# Altium PCB Main.PcbDoc
Units mil, origin at the board's own origin, x right, y up, seen from the top; angles counter-clockwise.
Board outline 1880 x 1290 mil, 2 copper layers (Top Layer, Bottom Layer); 14 components, 10 nets, 42 pads, 2 vias.
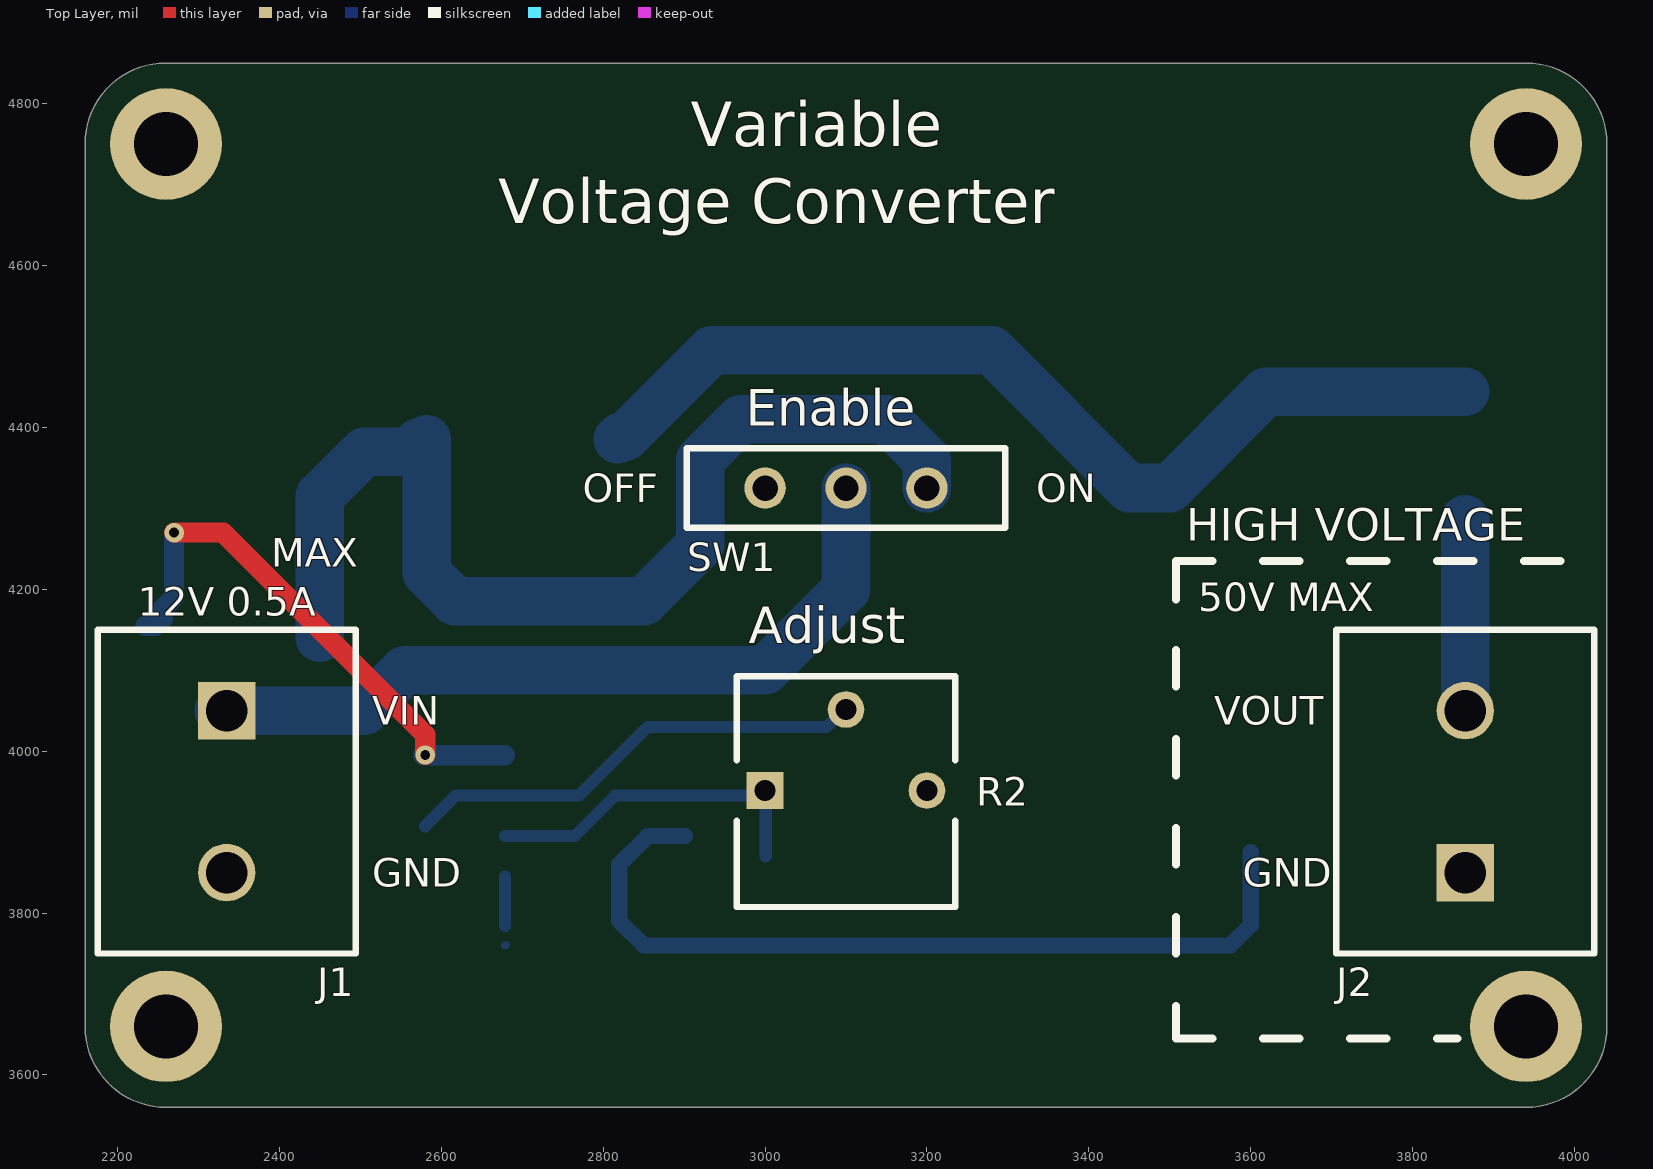
[diagram p0: Top Layer view]
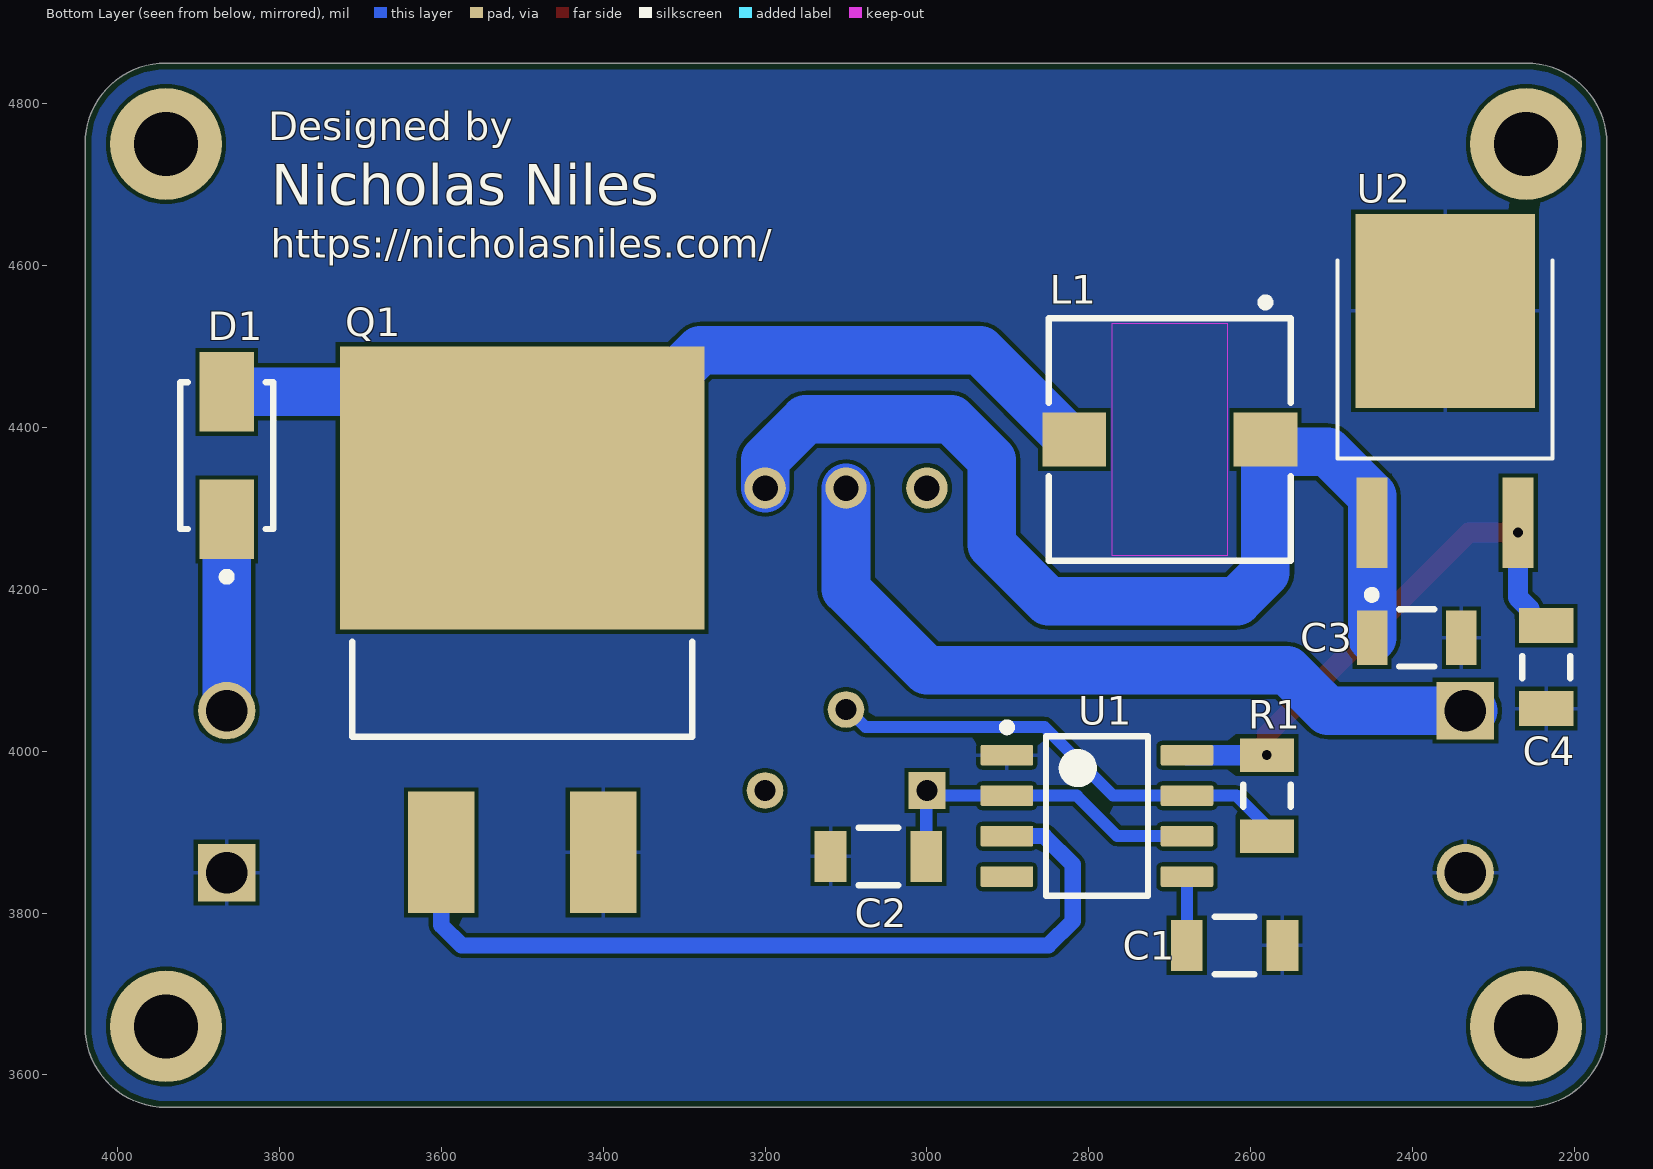
[diagram p1: Bottom Layer view, seen from below]
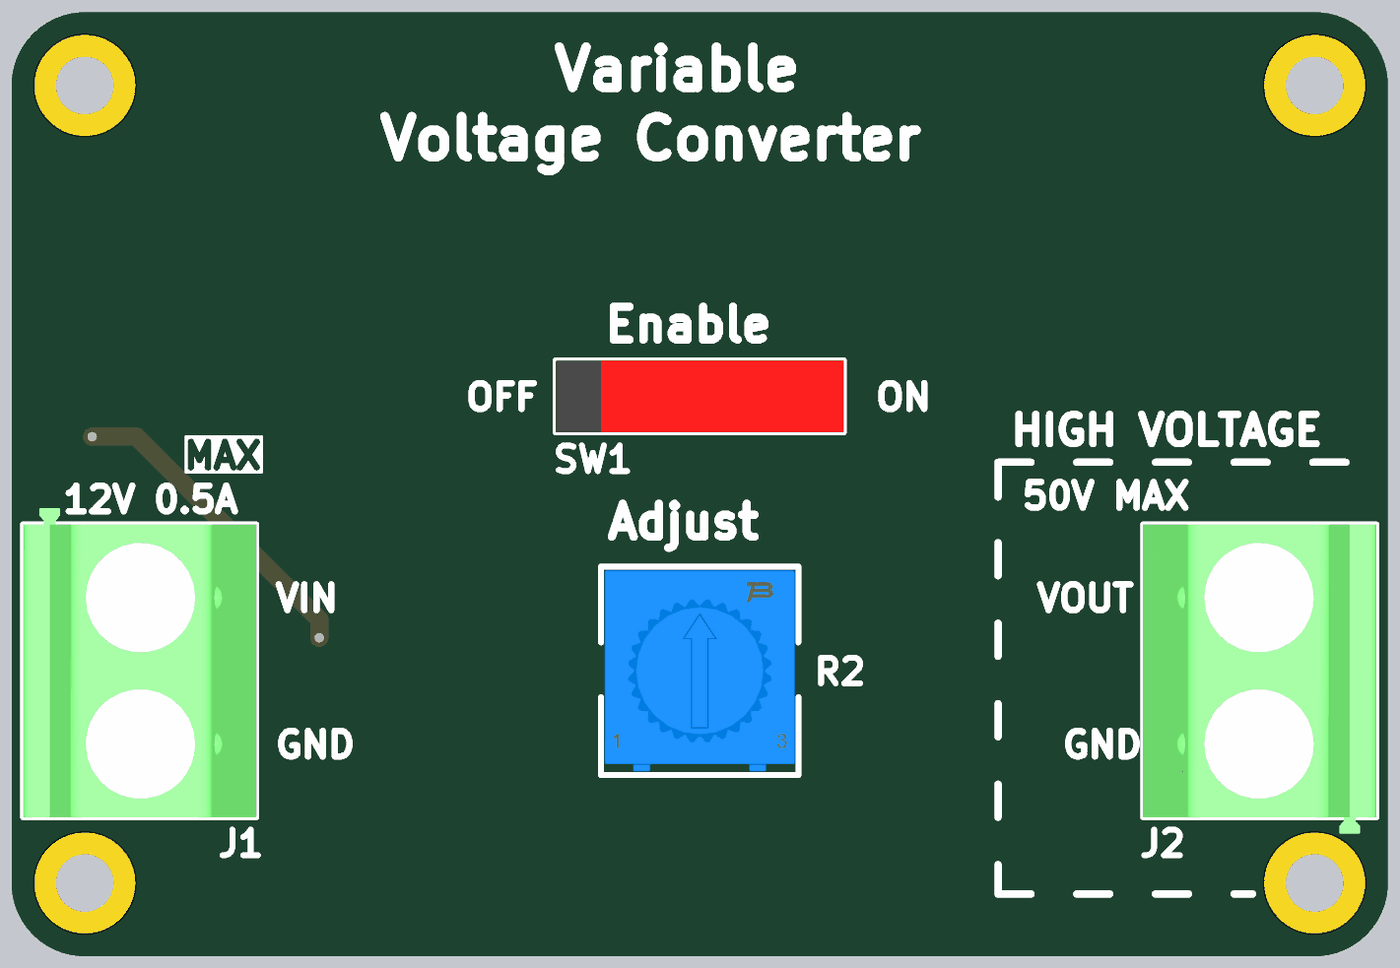
[diagram p2: 3D render of the assembled board from above, using the file's embedded part models]
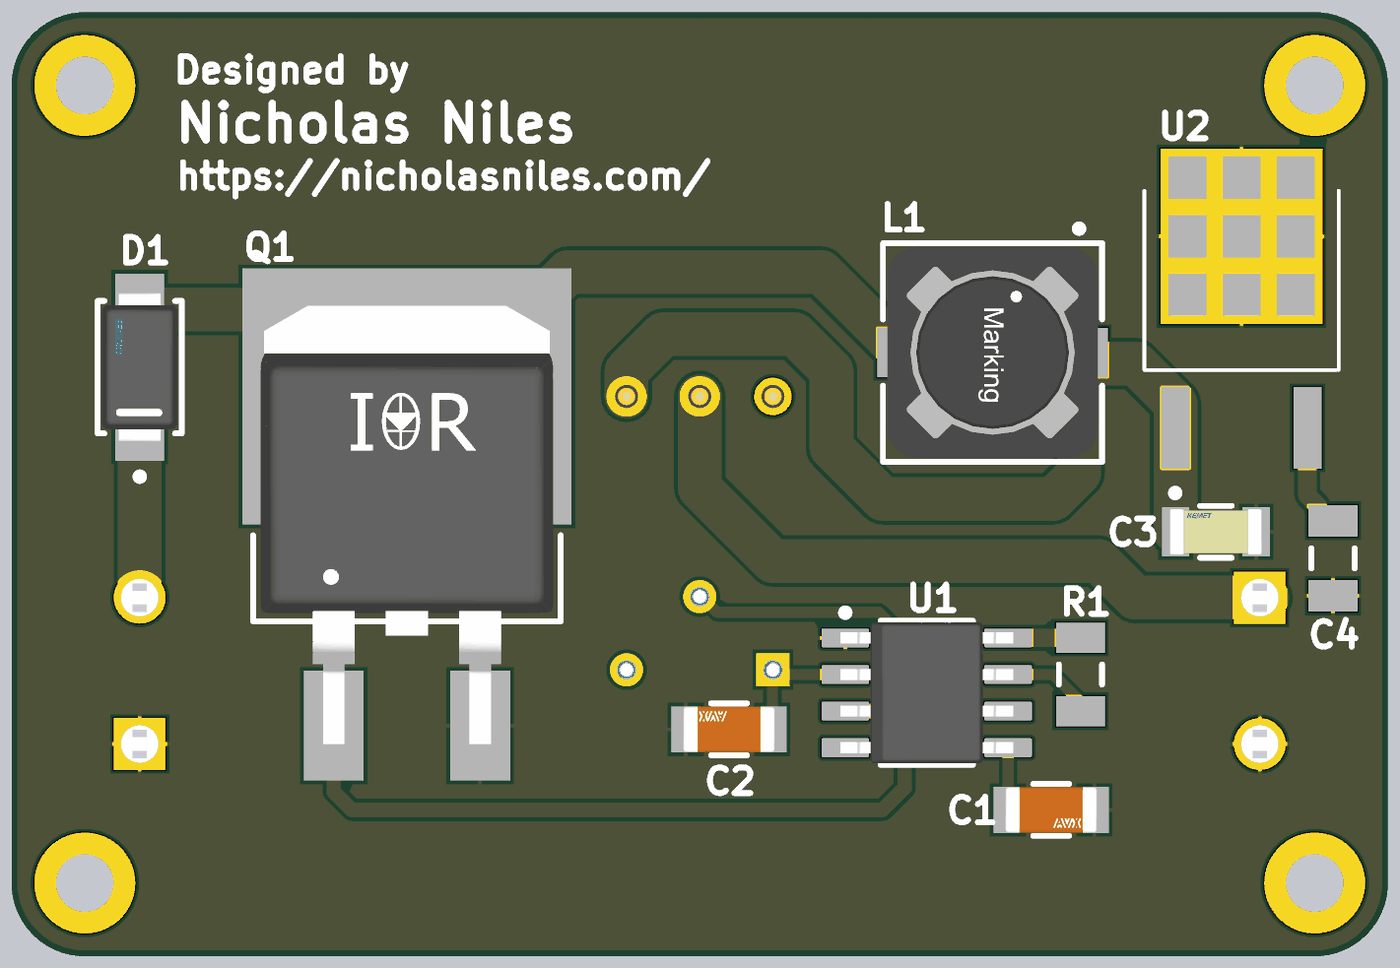
[diagram p3: 3D render of the assembled board from below, using the file's embedded part models]

## Layer stack, top to bottom
Top Solder: solder mask 0.4, Solder Resist, Dk 3.5
Top Layer: signal copper 1.4
Dielectric 1: dielectric 12.6, FR-4, Dk 4.8
Bottom Layer: signal copper 1.4
Bottom Solder: solder mask 0.4, Solder Resist, Dk 3.5

## Board outline
2160,3660 2160,4750 cw(c2260,4750) 2260,4850 3940,4850 cw(c3940,4750) 4040,4750 4040,3660 cw(c3940,3660) 3940,3560 2260,3560 cw(c2260,3660)

## Design rules (kind name [scope] priority, off if disabled: settings)
BoardOutlineClearance [All] p1: gap=7.87 ignorepadtopadclearanceinfootprint=FALSE
Clearance [All] p1: gap=5 ignorepadtopadclearanceinfootprint=TRUE except(10: Arc-Hole Track-Hole SMDPad-Hole THPad-Hole Via-Hole Fill-Hole Poly-Hole Region-Hole Text-Hole)
ComponentClearance [All] p1: gap=5 collisioncheckmode=3 verticalgap=5 showdistances=TRUE
DiffPairsRouting [All] p1: maxlimit=10 minlimit=5 mostfreqgap=5 toplayer_minwidth=5 toplayer_maxwidth=1000 toplayer_prefwidth=5 bottomlayer_minwidth=5 bottomlayer_maxwidth=1000 bottomlayer_prefwidth=5 maxuncoupledlength=500
Height [All] p1: minheight=0 maxheight=71497.94 prefheight=500
HoleSize [All] p1: absolutevalues=TRUE maxlimit=248.03 minlimit=11.81 maxpercent=80.000 minpercent=20.000
HoleToHoleClearance [All] p1: gap=10 allowstackedmicrovias=FALSE
MinimumAnnularRing [All] p1: minimumring=6
MinimumSolderMaskSliver [All] p1: minsoldermaskwidth=6
PlaneClearance [All] p1: clearance=5
PlaneConnect PlaneConnectPowerPads [InPadClass('PowerPads')] p1: planeconnectstyle=Direct reliefexpansion=20 reliefentries=4 reliefconductorwidth=10 reliefairgap=10
PlaneConnect [All] p2: pad.planeconnectstyle=Relief pad.reliefexpansion=11.81 pad.reliefentries=4 pad.reliefconductorwidth=5 pad.reliefairgap=5 via.planeconnectstyle=Direct via.reliefexpansion=11.81 via.reliefentries=4 via.reliefconductorwidth=5 via.reliefairgap=5
PolygonConnect PolygonConnectPowerPads [All vs (InPadClass('PowerPads'))] p1: connectstyle=Direct reliefconductorwidth=10 reliefentries=4 polygonreliefangle="90 Angle" airgapwidth=10
PolygonConnect [All] p2: thpad.connectstyle=Relief thpad.reliefconductorwidth=5 thpad.reliefentries=4 thpad.polygonreliefangle="90 Angle" thpad.airgapwidth=5 smdpad.connectstyle=Relief smdpad.reliefconductorwidth=5 smdpad.reliefentries=4 smdpad.polygonreliefangle="90 Angle" smdpad.airgapwidth=5 via.connectstyle=Direct via.reliefconductorwidth=5 via.reliefentries=4 via.polygonreliefangle="90 Angle" via.airgapwidth=5
RoutingVias [All] p1: holewidth=11.81 width=23.62 viastyle="Through Hole" minholewidth=11.81 minwidth=23.62 maxholewidth=23.62 maxwidth=259.84
SilkToSilkClearance [All] p1: silktosilkclearance=5
SilkToSolderMaskClearance [IsPad] p1: minsilkscreentomaskgap=5 clearancetoexposedcopper=TRUE
SolderMaskExpansion [All] p1: expansion=2 istentingtop=FALSE
SupplyNets "Schematic Supply Nets_2" [InNet('5V')] p1: voltage=0.000
SupplyNets "Schematic Supply Nets_1" [InNet('VIN')] p2: voltage=0.000
SupplyNets "Schematic Supply Nets" [InNet('GND')] p3: voltage=0.000
UnRoutedNet [All] p1: checkbadconnections=TRUE
Width Width_10mil [All] p1: maxlimit=1000 minlimit=10 preferedwidth=10 minimp=50.000000 maximp=50.000000 favimp=50.000000
Width Width_6mil [All] p2: maxlimit=1000 minlimit=6 preferedwidth=6 minimp=50.000000 maximp=50.000000 favimp=50.000000
Width Power_20mil [All] p3: maxlimit=1000 minlimit=20 preferedwidth=20 minimp=50.000000 maximp=50.000000 favimp=50.000000
Width Power_12mil [All] p4: maxlimit=1000 minlimit=12 preferedwidth=12 minimp=50.000000 maximp=50.000000 favimp=50.000000
Width Width_5mil [All] p5: maxlimit=1000 minlimit=5 preferedwidth=5 minimp=50.000000 maximp=50.000000 favimp=50.000000
19 further rules are at their usual default settings.

## Components (designator, comment, footprint, x,y, rotation, side; value= is the part's Value field where it differs from the comment)
C1 "100nF" FP-1206-L_3_2_0_2-W_1_6_0-MFG 2620,3760 r180 bottom
C2 "100nF" FP-1206-L_3_2_0_2-W_1_6_0-MFG 3060,3870 r0 bottom
C3 "0.33µF" FP-C1206C-EB-MFG 2395,4140 r180 bottom value="0.33 μF"
C4 "1µF" CAPC3216X110X50LL20T25 2235,4103.82 r270 bottom
D1 "S1B-13-F" FP-SMA-MFG 3865,4365 r90 bottom
J1 "1729128" PHOE-1729128-2_V 2335,3950 r270 top
J2 "1729128" PHOE-1729128-2_V 3865,3950 r90 top
L1 "4.7uH" WE-PDA_7345 2700,4385 r270 bottom
Q1 "IRLZ44NSTRLPBF" FP-PG-TO263-3-MFG 3500,4150 r180 bottom
R1 "1kΩ" RESC3116X65X50LL20T20 2580,3945 r90 bottom
R2 "100kΩ" FP-3362P-T-MFG 3100,3950 r0 top
SW1 "450301014042" 450301014042 3100,4325 r180 top
U1 "555 Timer IC" D0008A_M 2790,3920 r180 bottom
U2 "VIN->5V0" DPAK229P990X238-4N 2360,4445 r180 bottom

## Footprints (in the part's own frame and the unit in brackets; to place one, negate y for a bottom-side part, rotate by r counter-clockwise, add the part's x,y. Pads: shape width x height; smd on the part's side, far side on the other; paste and mask are expansions set on the pad)
450301014042 [mm] "THT Mini Slide Switch, body 10x2.5mm"
  round 1.3 hole 0.8: COM(0,0) L1(2.54,0) L2(-2.54,0)
  silkscreen extent -5,-1.25 5,1.25, body extent -5,-1.25 5,1.25, height 6.43
CAPC3216X110X50LL20T25 [mm] "Chip Capacitor, 2-Leads, Body 3.20x1.60mm, IPC High Density"
  rect 1.1x1.7 smd: 1(-1.3,0) 2(1.3,0)
  silkscreen extent -0.35,-0.75 0.35,0.75, body extent -1.7,-0.9 1.7,0.9, height 1.1
D0008A_M [mm] "SOIC, 8-Leads, Body 5x4mm, Pitch 1.27mm, IPC Low Density"
  rrect15% 1.65x0.65 smd: 1(-2.825,1.905) 2(-2.825,0.635) 3(-2.825,-0.635) 4(-2.825,-1.905) 5(2.825,-1.905) 6(2.825,-0.635) 7(2.825,0.635) 8(2.825,1.905)
  silkscreen extent -2.95,-2.5 1.6,2.9, body extent -3,-2.45 3,2.45, height 1.63
DPAK229P990X238-4N [mm]
  rect 0.97x2.83 smd: 1(-2.29,-4.14) 3(2.29,-4.14)
  rect 5.63x6.09 smd paste-4: 2(0,2.51)
  silkscreen extent -3.37,-6.5 3.37,4.09
FP-1206-L_3_2_0_2-W_1_6_0-MFG [mm]
  rect 1x1.6 smd paste+0 mask+0: 1(-1.5,0) 2(1.5,0)
  silkscreen extent -0.63,-0.9 0.63,0.9, body extent -1.6,-0.8 1.6,0.8, height 1.27
FP-3362P-T-MFG [mm]
  rect 1.15x1.15 hole 0.65 paste-2539.97 mask+0: 1(-2.54,0.035)
  round 1.15 hole 0.65 paste-2539.97 mask+0: 2(0,2.575) 3(2.54,0.035)
  silkscreen extent -3.42,-3.62 3.42,3.62, body extent -3.52,-3.72 3.52,3.72, height 0.25
FP-C1206C-EB-MFG [mm]
  rect 0.95x1.7 smd paste+0 mask+0: 1(-1.4,0) 2(1.4,0)
  silkscreen extent -0.55,-0.9 0.55,0.9, body extent -1.6,-0.8 1.6,0.8, height 0.88
FP-PG-TO263-3-MFG [mm]
  rect 2.08x3.81 smd paste+0 mask+0: 1(-2.54,-6.985) 3(2.54,-6.985)
  rect 11.43x8.89 smd paste+0 mask+0: 4(0,4.445)
  silkscreen extent -5.34,-3.36 5.34,-0.38, body extent -5.08,-7.66 5.08,7.59, height 5.09
FP-SMA-MFG [mm]
  rect 2.5x1.7 smd paste+0 mask+0: 1(-2,0) 2(2,0)
  silkscreen extent -3.92,-1.46 2.3,1.46, body extent -2.6,-1.3 2.6,1.3, height 2.4
PHOE-1729128-2_V [mm] "Receptacle, 2-Leads, Body 8.1x10.16mm, Pitch 5.08mm"
  rect 1.8x1.8 hole 1.3: 1(-2.54,0)
  round 1.8 hole 1.3: 2(2.54,0)
  silkscreen extent -5.08,-4.05 5.08,4.05, body extent -5.65,-4.05 5.08,4.05, height 10.01
RESC3116X65X50LL20T20 [mm] "Chip Resistor, 2-Leads, Body 3.10x1.60mm, IPC High Density"
  rect 1.05x1.7 smd: 1(-1.275,0) 2(1.275,0)
  silkscreen extent -0.35,-0.75 0.35,0.75, body extent -1.65,-0.9 1.65,0.9, height 0.65
WE-PDA_7345 [mm] "SMD Shielded Power Inductor, 2-leads, body 7.3x7.3mm"
  rect 1.7x2 smd: 1(0,3) 2(0,-3)
  Top Layer keep-out region: -3.65,1.8 3.65,1.8 3.65,-1.8 -3.65,-1.8
  silkscreen extent -4.42,-3.8 3.8,3.8, body extent -3.65,-3.65 3.65,3.65, height 4

## Part data
C1 C2: library part CMP-04427-004798-1, "General Purpose Ceramic Capacitor, 1206, 100nF, 10%, X7R, 15%, 100V", Case Code (Imperial)=1206, Case Code (Metric)=3216, Dielectric=X7R, Max Operating Temperature=125°C, Min Operating Temperature=-55°C, Package Quantity=1, Tolerance=10%, Voltage Rating=100V, Capacitance=100nF, Case/Package=1206, Construction=Flat, Depth=1.6mm, Features="Soft Termination", Lead Free="Lead Free", Length=3.2mm, Mount="Surface Mount", Number of Pins=2, Packaging="Tape and Reel", Radiation Hardening=No, REACH SVHC="No SVHC", RoHS Compliant=Yes, Series=FLEXITERM®, Termination=SMD/SMT, Thickness=0.05inch, Voltage Rating (DC)=100V, Width=0.063inch
C3: library part CMP-1037-04487-2, "CAP CER 0.33UF 50V X7R 1206", Capacitance="0.33 μF", Manufacturer=KEMET, Manufacturer Part Number=C1206C334K5RACTU, Package=C1206C-EB, Temperature="-55°C to +150°C", Temperature Characteristic=X7R, Temperature Coefficient=15%, Temperature Range High=+150°C, Temperature Range Low=-55°C, Tolerance=0.1, Voltage Rating="50 V", Automotive=Yes, Automotive Grade="Grade 0", Category=Cap, ComponentLink2Description=Datasheet, ComponentLink2URL=https://content.kemet.com/datasheets/KEM_C1007_X8R_ULTRA_150C_SMD.pdf, Device Class L1="Passive Components", Device Class L2=Capacitors, Device Class L3="Ceramic Capacitors", Digikey Description="CAP CER 0.33UF 50V X7R 1206", Height=0.88mm, Ipc Land Pattern Name=CAPC320160X78, Lead Free=Yes, Material=Ceramic, Mouser Description="Multilayer Ceramic Capacitors MLCC - SMD/SMT 50volts 0.33uF X7R 10%", Octopart=https://octopart.com/c1206c334k5ractu-kemet-146059, RoHS=TRUE
C4: library part CMP-2000-06011-1, "Chip Capacitor, 1 uF, +/- 10%, 50 V, -55 to 125 degC, 1206 (3216 Metric), RoHS, Tape and Reel", Capacitance=1uF, Capacitance - nF=1000nF, Case Code - in=1206, Case Code - mm=3216, Case Height=1mm, Case Length=3.2mm, Case Width=1.6mm, Dielectric=X7R, Manufacturer=Kemet, Maximum Operating Temperature=+125C, Minimum Operating Temperature=-55C, Operating Temperature Range=-55Cto+125C, Package / Case=1206(3216metric), Package Description="2-Pin Surface Mount Device, Body 3.2 x 1.6 mm", Temperature Coefficient / Code=+/-15%, Tolerance=10%, Voltage Rating=50V, Brand=Kemet, Class=Class1, Datasheet URL=http://www.kemet.com/docfinder?Partnumber=C1206C105K5RACTU, Datasheet Version=02/2016, Dimensions=1.6mmWx3.2mmLx1mmH, Factory Pack Quantity=2500, Manufacturer URL=http://www.kemet.com/, Mounting Technology=SurfaceMount, Package Reference=1206, Packaging=Reel, Product=GeneralTypeMLCCs, Product Category=MultilayerCeramicCapacitorsMLCC-SMD/SMT, RoHS=Details, Series=C1206C, Termination Style=SMD/SMT, Type=SMDMLCCX7R6.3-250VDCCommericalGrade, Voltage Rating DC=50V
D1: library part CMP-12791-000051-1, "DIODE GEN PURP 100V 1A SMA", Average Rectified Current=1A, Capacitance=10pF, Case/Package=SMA, Forward Voltage=1.1V, Max Operating Temperature=150°C, Max Repetitive Reverse Voltage (Vrrm)=100V, Max Surge Current=30A, Min Operating Temperature=-65°C, Package Quantity=5000, Peak Reverse Current=5uA, Contact Plating=Tin, Current Rating=1A, Element Configuration=Single, Forward Current=1A, Height=2.1mm, Lead Free="Lead Free", Length=4.6mm, Max Reverse Voltage (DC)=100V, Mount="Surface Mount", Number of Pins=2, Output Current=1A, Packaging="Tape and Reel", Peak Non-Repetitive Surge Current=30A, Polarity=Standard, Radiation Hardening=No, Recovery Time=1.8us, Reverse Recovery Time=3us, Reverse Voltage (DC)=100V, Termination=SMD/SMT, Voltage Rating (DC)=100V, Weight=0.002258oz, Width=2.92mm
J1 J2: library part CMP-2000-05815-1, "PCB Terminal Block, 13.5 A, 400 V, 2-Pin THD, RoHS, Bulk", Current Rating=13500mA, Manufacturer="Phoenix Contact", Package Description="2-Pin Through Hole Device, Body 8.1 x 10.16 mm, Pitch 5.08 mm", Package Reference=1729128-2, Package Version=03/2015, Voltage Rating=400V, Datasheet URL=https://datasheet.ciiva.com/16046/1729128-16046181.pdf, Datasheet Version=12/2013, Manufacturer URL=http://www.phoenixcontact.com/, Mounting Technology=ThroughHole, No. of Positions=2, No. of Rows=1, Orientation=Horizontal, Package URL=https://www.phoenixcontact.com/online/portal/pi/pxc/product_detail_page/!ut/p/b1/3VdJjqNKFDxLH8AFycySyWY2ozFsEPOMMQaDOX1XedGL_1Vdm5YXJleknhSKeBkvI6EA8ncAo3AYoDhBQGco6KN7VURTdemj9us_IEKEZo_YHiPAEWEFmDGOHMORkqKYCORBZxgL7ZoaZYcbFFUZ3fqxSY6GOuxydWUuHqz1ynmMFygu583Bob0Ewr6Sd_l-5m-kAueHiB0jpRwZwe58wwtkpxtMYd_LmGcDRU02dRNEyWt6Y2ti5pSyJ_reIkzIulrqApdnbT11V5jnCKbYNCvhEM1MCpPByat_X379-iThf08CI5GfOPqfBeS3BRoBOdD55AKVv0iLwCMq-2BrzXWSGRH7pUGD9uwXQjiph3xL0DKQwdGa0JImiIOmBNOestqgwTHSSs2oOep-78apyXQBvNi8ZLaFjvjWvcaUEBu0MC6Wbe-d6mB0FAebo2lUWinqYaZs5DAYzV0RP9yitUjnGJ0iI9xhZkT42OCQNUJJhkgWINNQLP2JFP6OpMg3JCVg70jqHT0lvKOnhHf0lPuOnnLf0VPuWx6_dxwUIvwk5WMkT0kLL1mh61l2yZVSzG3pYV_bqo-mj6uMKwKwdnnW8Jh5RTOJzMOA5c-eJDaZQw4mTMPH02PvS_ZAqNVjVTo2WyYLkwH_KU1mmmG5kjRhDqPXLwwVHvVOjCM60-fpXvTDfMGW1PVFVS1r4e4yVDk4ZdNbkUHvqPqQSeian4UD39fNKmachqdJ1NJbyk8rXT9mXTvPk3oE5meulKGgiruPJek-4I9hTT6G8ZLOyRSm2RRVbThERQad5OS28hdt4YW4vG0stgYYzsWsK4_7y6DZMjJSCqri1kyiZR5vD7pwIrNR7QwPHTcLTI5qT7eRlpHrdGiupYlqQDJ7zy_CND8fWWBoLRXxk1RVcXiBQwbTD4Xi7KL-FuO94t9xaqweXzH, Packing=Bulk, PartNumber=1729128, Pitch=5.08mm, RoHS=TRUE
L1: library part 784777047, "WE-PDA SMT Shielded Power Inductor, size 7345, 4.7uH, 2.35A, 84mOhm", Case/Size Code=7345, DC Resistance=70mOhm, DC Resistance Max=84mOhm, Manufacturer="Wurth Elektronik", Operating Temperature Max=125°C, Operating Temperature Min=-40°C, Rated Current=2.35A, Saturation Current=3.7A, Self Resonant Frequency=64.7MHz, Automotive=Yes, Category="Power Inductors", ComponentLink1Description="Website Link", ComponentLink1URL=https://www.we-online.com/redexpert/article/784777047?ad, ComponentLink2Description="Datasheet Link", ComponentLink2URL=https://www.we-online.com/redexpert/spec/784777047?ad, Height=4mm, Inductance=4.7uH, Length=7.3mm, Manufacturer Part Number=784777047, Match Code=WE-PDA, Mount="Surface Mount", Packaging="Tape and Reel", Width=7.3mm
Q1: library part CMP-32901-000495-1, "MOSFET N-CH 55V 47A D2PAK", Case/Package=D2PAK, Continuous Drain Current (ID)=47A, Drain to Source Breakdown Voltage=55V, Drain to Source Resistance=35mR, Gate to Source Voltage (Vgs)=16V, Input Capacitance=1.7nF, Max Operating Temperature=175°C, Max Power Dissipation=3.8W, Min Operating Temperature=-55°C, Power Dissipation=110W, Threshold Voltage=2V, Drain to Source Voltage (Vdss)=55V, Element Configuration=Single, Halogen Free="Halogen Free", Height=0.19inch, Lead Free="Contains Lead", Length=0.42inch, Max Dual Supply Voltage=55V, Mount="Surface Mount", Number of Pins=3, Packaging="Tape and Reel", Rds On Max=22mR, REACH SVHC="No SVHC", RoHS Compliant=Yes, Turn-Off Delay Time=26ns, Turn-On Delay Time=11ns, Width=0.38inch
R1: library part CMP-2003-04880-1, Manufacturer="Vishay Dale", Part Number=CRCW12061K00JNEAHP
R2: library part CMP-07234-000031-1, "TRIMMER 100K OHM 0.5W PC PIN TOP", Max Operating Temperature=125°C, Max Power Dissipation=500mW, Min Operating Temperature=-55°C, Package Quantity=50, Resistance=100kR, Resistor Type=Cermet, Temperature Coefficient=100ppm/°C, Tolerance=10%, Height=0.185inch, Length=0.275inch, Mount="Through Hole", Packaging=Rail/Tube, Power Rating=500mW, RoHS Compliant=Yes, Series="Trimpot® 3362 - Sealed", Technology=CERMET, Termination="PC Pin", Width=0.26inch
SW1: "WS-SLTV THT Mini Slide Switch, Opposite Side Connection, SPDT, 12VDC, 500mA, 800g", Manufacturer="Wurth Elektronik", Operating Temperature Max=85°C, Operating Temperature Min=-40°C, Rated Current=500mA, Rated Voltage=12VDC, Category="Slide Switches", Circuit=SPDT, ComponentLink1Description="Website Link", ComponentLink1URL=https://www.we-online.com/redexpert/article/450301014042?ad, ComponentLink2Description="Datasheet Link", ComponentLink2URL=https://www.we-online.com/redexpert/spec/450301014042?ad, Contact Material="Copper Alloy", Contact Plating=Gold, Height=6.4mm, Length=10mm, Manufacturer Part Number=450301014042, Match Code=WS-SLTV, Mount="Through Hole", Operation Force=800g, Packaging=Bulk, Terminal Material="Copper Alloy", Terminal Plating=Gold, Width=2.5mm
U1: library part CMP-0056-00105-3, "Timer, 8-pin Narrow SOIC, Pb-Free", Manufacturer="Texas Instruments", PackageTopMarking=NSZXTT*LM*555CM, PowerWise=N, Code_IPC=SOIC127P600-8, Code_JEDEC=MS-012-AA, ComponentLink1Description="Datasheet URL", ComponentLink1URL=http://www.ti.com/general/docs/lit/getliterature.tsp?genericPartNumber=LM555&fileType=pdf, CompType="Analog IC", PackageDescription="SOIC Narrow, 4.9 x 3.9 x 1.45mm, 8 Lead, 1.27mm Pitch", PackageReference=D0008A, PinCount=8, RoHS=Y
U2: library part MC7805BDTRKG, "Linear Voltage Regulator IC 1 Output 1A DPAK", Package="TO-252-3 Freescale Semiconductor", Availability=Unavailable, MF="ON Semiconductor", MP=MC7805BDTRKG, Price=None, SnapEDA_Link=https://www.snapeda.com/parts/MC7805BDTRKG/ON%20Semiconductor/view-part/360207/?ref=snap

## Free pads (board coordinates)
  round 137.79 hole 78.74: 7(2260,3660) 7(2260,4750) 7(3940,3660) 7(3940,4750)

## Via types
v1: diameter 24, hole 12, Top Layer to Bottom Layer, tented both sides, 2 vias

## Nets (pads, with @x,y where several pads share a name; then routed paths per layer and width w, separated by ;. In a path a pad name is that pad's centre, name@x,y a point inside that pad or via, vN(x,y) a via of type N, cw(c..) or ccw(c..) an arc to the next point about the centre after c; other vN are vias at no path point)
5V: C4.1 R1.2 U1.8 U2.3 | length 676.2
  Top Layer w25: v1(2270,4270) 2330.63,4270 2580.32,4020.31 v1(2580.32,3995.2)
  Bottom Layer w25: C4.1 2246.81,4155 2255.96,4164.15 2255.96,4175.96 2270,4190 v1(2270,4270) ; R1.2@2577.81,3995 U1.8
GND: C1.2 C2.2 C3.2 C4.2 J1.2 J2.1 Q1.3 U1.1 U2.2
IND: D1.2 L1.2 Q1.4 | length 1212.1
  Bottom Layer w60: L1.2 2821.57,4388.46 2827.48,4388.46 2934.02,4495 3280,4495 3450,4325 Q1.4 3618.74,4443.74 D1.2
NetC1_1: C1.1 U1.5 | length 61.8
  Bottom Layer w10: C1.1 C1.1@2679.65,3760.6
  Bottom Layer w15: C1.1@2678.78,3784.07 U1.5
NetC2_1: C2.1 R2.1 U1.2 U1.6 | length 426.3
  Bottom Layer w15: U1.6 2765,3895 2815,3945 U1.2 2993.62,3945 R2.1 3000.94,3950.43 C2.1
NetD1_1: D1.1 J2.2 | length 236.3
  Bottom Layer w60: J2.2 D1.1
NetJ1_1: J1.1 SW1.COM | length 962.1
  Bottom Layer w60: J1.1@2325,4050 2505,4050 2555,4100 3000,4100 3100,4200 SW1.COM
NetR1_1: R1.1 R2.2 U1.7 | length 579.7
  Bottom Layer w15: R1.1@2580,3907.3 2617.7,3945 2770,3945 2855,4030 3076.08,4030 3097.45,4051.38 R2.2
OUT: Q1.1 U1.3 | length 1058.5
  Bottom Layer w20: U1.3 2855,3895 2820,3860 2820,3790 2850,3760 3575,3760 3600,3785 Q1.1
VIN: C3.1 L1.1 SW1.L2 U2.1 | length 1343.7
  Bottom Layer w60: C3.1@2450.16,4140 2450.16,4277.01 2450.16,4315.16 2505,4370 2560.98,4370 2572.52,4381.54 2578.43,4381.54 L1.1 2581.89,4220.15 2617.04,4185 2850,4185 2920,4255 2920,4359.85 2970.15,4410 3150,4410 3200,4360 SW1.L2
pads on no net: R2.3 SW1.L1 U1.4

## Polygon pours and split planes (outlines as drawn)
GND on Bottom Layer "GND_L02_P000" (solid, pour order 0): 4040,4850 2160,4850 2160,3560 4040,3560

## Silkscreen, mask and mechanical layers (free items; w line width, h text height)
Top Overlay:
  lines w10: 3507.5,3685 3507.5,3645 3552.5,3645 ; 3507.5,3750 3507.5,3795 ; 3507.5,3860 3507.5,3905 ; 3507.5,3970 3507.5,4015 ; 3507.5,4080 3507.5,4125 ; 3507.5,4187.5 3507.5,4232.5 ; 3507.5,4235 3552.5,4235 ; 3615,3645 3660,3645 ; 3615,4235 3660,4235 ; 3722.5,3645 3767.5,3645 ; 3722.5,4235 3767.5,4235 ; 3830,3645 3855,3645 ; 3830,4235 3875,4235 ; 3937.5,4235 3982.5,4235
  text "Variable" at 2908.4,4747.02 h55
  text "Voltage Converter" at 2670.14,4652.02 h55
  text "Enable" at 2976.29,4402 h45
  text "OFF" at 2775,4307.51 h35
  text "ON" at 3335,4307.51 h35
  text "HIGH VOLTAGE" at 3520,4260 h40
  text "MAX" at 2390,4227.51 h35
  text "50V MAX" at 3535,4172.51 h35
  text "12V 0.5A" at 2225,4167.51 h35
  text "Adjust" at 2980.04,4133.01 h45
  text "VIN" at 2515,4032.51 h35
  text "VOUT" at 3555,4032.51 h35
  text "GND" at 2515,3832.51 h35
  text "GND" at 3590,3832.51 h35
Bottom Overlay:
  text "Designed by" at 3813.69,4754.66 h35
  text "Nicholas Niles" at 3809.89,4675 h50
  text "https://nicholasniles.com/" at 3810.7,4609.66 h35
Mechanical 1:
  the board outline again, w10